# Altium PCB CH32V103R-R1-1v1.PcbDoc (part 2 of 2)
Units mil, origin at the board's own origin, x right, y up, seen from the top; angles counter-clockwise.
Board outline 2913.39 x 3002 mil, 2 copper layers (Top Layer, Bottom Layer); 62 components, 91 nets, 361 pads, 452 vias.
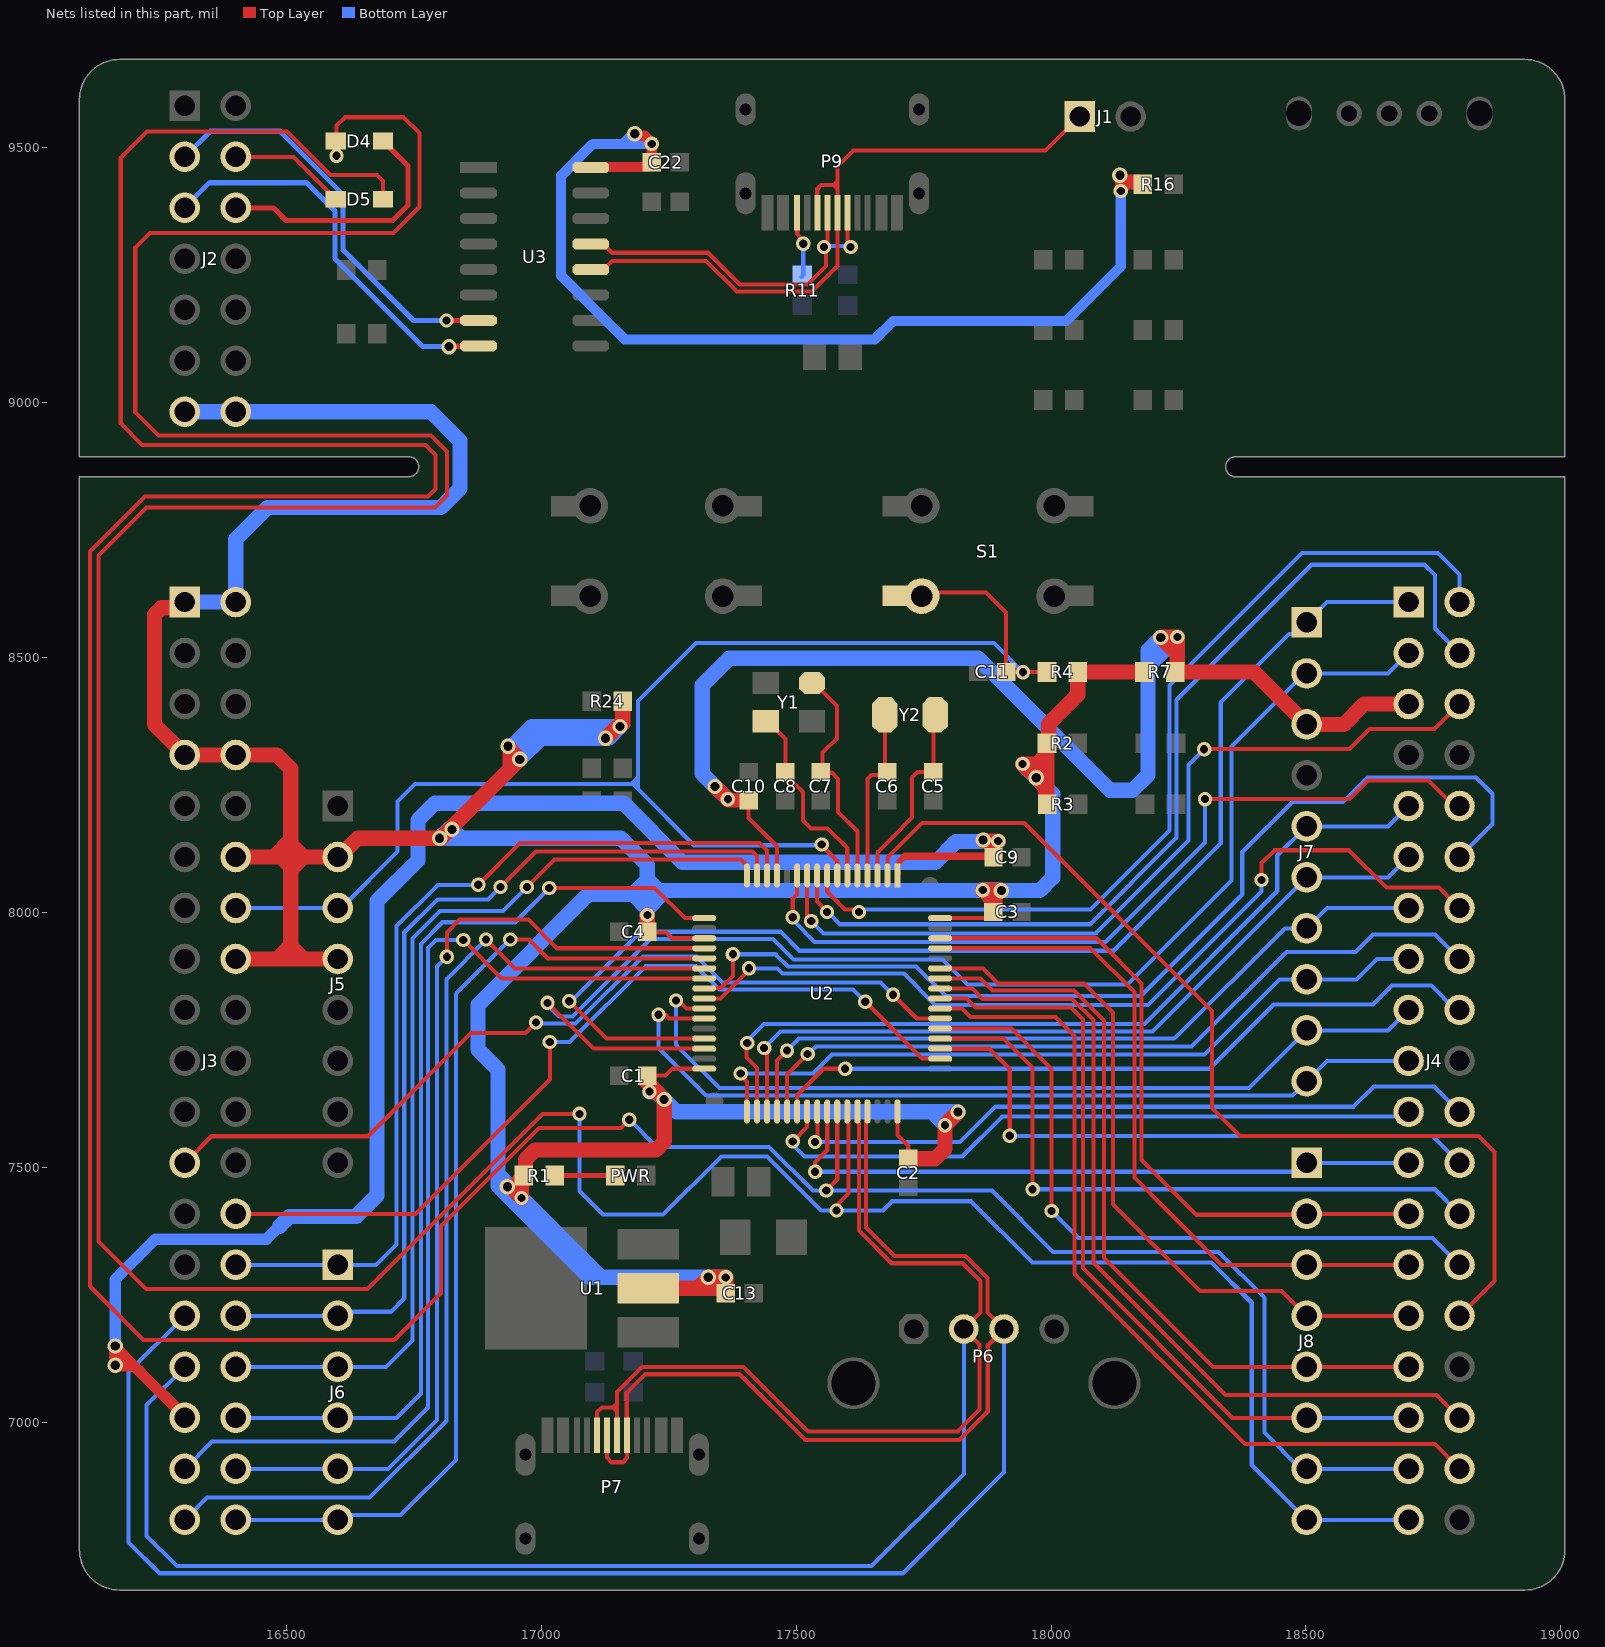
[diagram p2: the nets of this part, all layers, seen from the top]

## Via types
v1: diameter 24, hole 12, Top Layer to Bottom Layer, tented both sides, 303 vias
v2: diameter 28, hole 16, Top Layer to Bottom Layer, tented both sides, 114 vias
v3: diameter 30, hole 18, Top Layer to Bottom Layer, tented both sides, 35 vias

## Nets (pads, with @x,y where several pads share a name; then routed paths per layer and width w, separated by ;. In a path a pad name is that pad's centre, name@x,y a point inside that pad or via, vN(x,y) a via of type N, cw(c..) or ccw(c..) an arc to the next point about the centre after c; other vN are vias at no path point) (continued)
NetP9_B5: P9.B5 R11.1 | length 139
  Top Layer w8: P9.B5@17502.18,9372.24 17502.18,9330.48 17513.97,9318.69 v2(17513.97,9311.6) v2@17513.97,9304.52
  Bottom Layer w8: R11.1@17510.63,9246.57 17513.97,9249.9 17513.97,9273 v2(17513.97,9311.6)
NetPWR_1: PWR.1 R1.1 | length 118.9
  Top Layer w10: R1.1@17026.69,7484 PWR.1@17145.56,7484
NRST: C11.2 J3.14 J5.3 pad.@17699.01,8621.31 R4.1 S1.1 U2.7 | length 2839.9
  Top Layer w8: v2(17550.16,8133.34) 17550.16,8131.8 17580.7,8101.26 U2.7@17580.7,8072.55 ; S1.1@17746.25,8620.23 17753.35,8627.32 17872.7,8627.32 17912.02,8588.01 C11.2@17912.02,8471.72 R4.1@17992,8471.72
  Bottom Layer w8: J3.14@16401.17,8008.81 J5.3@16601.17,8008.81 16607.95,8008.81 16718.35,8119.21 16718.35,8217.29 16753.03,8251.97 17176.81,8251.97 ; v2(17550.16,8133.34) 17548.62,8131.8 17300.07,8131.8 17189.9,8241.97 ; v2(17945.08,8471.05) 17888.06,8528.08 17303.4,8528.08 17189.9,8414.57 17189.9,8265.06 ; 17176.81,8251.97 17179.9,8251.97 ; 17176.81,8251.97 17189.9,8265.06 ; 17179.9,8251.97 17188.35,8251.97 17189.9,8253.51 ; 17179.9,8251.97 17189.9,8241.97 ; 17189.9,8241.97 17189.9,8253.51 ; 17189.9,8253.51 17189.9,8265.06
PA0: J3.28 J6.1 U2.14 | length 1805.8
  Top Layer w8: v2(16876.64,8054.23) 16958.88,8136.48 17428.3,8136.48 17442.9,8121.87 U2.14@17442.9,8072.55
  Bottom Layer w8: J3.28@16401.17,7308.81 J6.1@16601.17,7308.81 16676.4,7308.81 16716.22,7348.63 16716.22,7973.22 16797.22,8054.23 v2(16876.64,8054.23)
PA1: J3.30 J6.2 U2.15 | length 1861.5
  Top Layer w8: v2(16920.17,8049.84) 16989.88,8119.56 17414.46,8119.56 17423.22,8110.8 U2.15@17423.22,8072.55
  Bottom Layer w8: J3.30@16401.17,7208.81 J6.2@16601.17,7208.81 16609.24,7216.88 16705.46,7216.88 16731.49,7242.91 16731.49,7960.43 16796.37,8025.3 16895.62,8025.3 v2(16920.17,8049.84)
PA2: J3.32 J6.3 U2.16 | length 1901.5
  Top Layer w8: v2(16972,8050) 17026.07,8104.07 17392.09,8104.07 17401.63,8094.53 17401.63,8093.2 17403.53,8091.3 U2.16@17403.53,8072.55
  Bottom Layer w8: J3.32@16401.17,7108.81 J6.3@16601.17,7108.81 16695.63,7108.81 16747.28,7160.46 16747.28,7949.21 16801.32,8003.25 16925.25,8003.25 v2(16972,8050)
PA3: J3.34 J6.4 U2.17 | length 1889.9
  Top Layer w8: v2(17016,8048) 17222.52,8048 17281.71,7988.81 U2.17@17319.79,7988.81
  Bottom Layer w8: J3.34@16401.17,7008.81 J6.4@16601.17,7008.81 16716.15,7008.81 16764.08,7056.74 16764.08,7938.11 16806.76,7980.79 16948.79,7980.79 v2(17016,8048)
PA4: J3.36 J6.5 U2.20 | length 1937.1
  Top Layer w8: v2(16815,7913) 16815,7961.01 16840.01,7986.02 16974.83,7986.02 17031.09,7929.75 U2.20@17319.79,7929.75
  Bottom Layer w8: J3.36@16401.17,6908.81 J6.5@16601.17,6908.81 16700.02,6908.81 16795.65,7004.44 16795.65,7893.65 v2(16815,7913)
PA5: J3.38 J6.6 U2.21 | length 1940.9
  Top Layer w8: v2(16939.33,7947.13) 16975.87,7947.13 17012.94,7910.07 U2.21@17319.79,7910.07
  Bottom Layer w8: J3.38@16401.17,6808.81 J6.6@16601.17,6808.81 16610.26,6817.9 16724.16,6817.9 16832.82,6926.56 16832.82,7840.62 v2(16939.33,7947.13)
PA6: J3.37 U2.22 | length 2020.8
  Top Layer w8: v2(16892,7947) 16948.62,7890.38 U2.22@17319.79,7890.38
  Bottom Layer w8: J3.37@16301.17,6808.81 16344.73,6852.37 16663.38,6852.37 16813.98,7002.97 16813.98,7868.98 v2(16892,7947)
PA7: J3.35 U2.23 | length 2007
  Top Layer w8: v2(16847.29,7945.84) 16922.43,7870.7 U2.23@17319.79,7870.7
  Bottom Layer w8: J3.35@16301.17,6908.81 16354.5,6962.14 16711.28,6962.14 16778.34,7029.2 16778.34,7930.02 16794.15,7945.84 v2(16847.29,7945.84)
PA8: J4.23 J8.1 U2.41 | length 1299
  Top Layer w8: v2(17537.38,7491.56) 17537.4,7510.04 17561.01,7533.66 U2.41@17561.01,7609.79
  Bottom Layer w8: v2(17537.38,7491.56) 18483.92,7491.56 J8.1@18501.17,7508.81 J4.23@18701.17,7508.81
PA9: D5.2 J4.35 J8.7 U2.42 | length 7501.3
  Top Layer w8: D5.2@16690,9399 16690,9434.35 16678.27,9446.08 16587.21,9446.08 16501.42,9531.87 16226.6,9531.87 16175.52,9480.78 16175.52,8958.58 16217.34,8916.75 16773.38,8916.75 16793.08,8897.05 16793.08,8830.68 16778.4,8816.01 16223.18,8816.01 16115.24,8708.06 16115.24,7266.95 16220.48,7161.71 16711.91,7161.71 16803.47,7253.27 16803.47,7384.94 16996.04,7577.51 17156.8,7577.51 v2(17172.9,7593.61) ; v2(17559.05,7454.62) 17580.7,7476.26 U2.42@17580.7,7609.79
  Bottom Layer w8: v2(17172.9,7593.61) 17226.09,7540.42 17447,7540.42 17532.81,7454.62 v2(17559.05,7454.62) 17883.86,7454.62 18004.11,7334.37 18328.88,7334.37 18418.25,7245 18418.25,6980.08 18489.52,6908.81 J8.7@18501.17,6908.81 J4.35@18701.17,6908.81
PA10: D4.1 J4.37 J8.8 U2.43 | length 7778.1
  Top Layer w8: D4.1@16598.43,9511.66 16598.43,9543.05 16614.93,9559.56 16730.42,9559.56 16761.53,9528.45 16761.53,9384.05 16710.16,9332.68 16232.39,9332.68 16203.99,9304.28 16203.99,8980.82 16249.19,8935.62 16784.21,8935.62 16815.53,8904.31 16815.53,8817.61 16791.74,8793.82 16225.63,8793.82 16131.63,8699.82 16131.63,7354.39 16224.66,7261.36 16659.21,7261.36 17002.85,7605 v2(17075,7605) ; v2(17579.3,7415.54) 17583.13,7419.37 17583.13,7428.96 17603,7448.83 17603,7607.18 U2.43@17600.38,7609.79
  Top Layer w10: v2(16598.43,9484.17) D4.1@16598.43,9511.66
  Bottom Layer w8: v2(17075,7605) 17075,7454.01 17121.64,7407.37 17238.94,7407.37 17353.34,7521.76 17443.03,7521.76 17549.25,7415.54 v2(17579.3,7415.54) 17670.24,7415.54 17688.26,7433.55 17843.24,7433.55 17963.24,7313.56 18314.66,7313.56 18393.64,7234.58 18393.64,6916.34 J8.8@18501.17,6808.81 J4.37@18701.17,6808.81
PA11: J3.31 P6.2 P7.A7 P7.B7 U2.44 | length 4145.1
  Top Layer w8: P7.B7@17109.55,6974.76 17109.55,7019.85 17119.16,7029.46 17140.98,7029.46 ; P7.A7@17148.92,6974.76 17148.92,7021.52 ; 17148.92,7044.6 17148.92,7037.4 ; U2.44@17620.07,7609.79 17620.07,7591.05 17623.04,7588.07 17623.04,7376.19 17687.2,7312.03 17826.17,7312.03 17861.3,7276.9 17861.3,7215.37 P6.2@17829,7183.06 17859.68,7152.38 17859.68,7025.02 17816.96,6982.31 17523.11,6982.31 17397.13,7108.28 17197.47,7108.28 17148.92,7059.74 17148.92,7037.4 ; 17140.98,7029.46 17148.92,7037.4 ; 17140.98,7029.46 17148.92,7029.46 ; 17140.98,7029.46 17148.92,7021.52 ; 17148.92,7021.52 17148.92,7029.46 ; 17148.92,7029.46 17148.92,7037.4
  Bottom Layer w8: J3.31@16301.17,7108.81 16226.02,7033.66 16226.02,6777.4 16285.4,6718.02 17647.96,6718.02 17829,6899.06 P6.2@17829,7183.06
PA12: J3.29 P6.3 P7.A6 P7.B6 U2.45 | length 4409.4
  Top Layer w8: P7.A6@17129.24,6974.76 17129.24,6930.78 17138.3,6921.71 17160.11,6921.71 17168.61,6930.21 P7.B6@17168.61,6974.76 17167.93,6975.44 17167.93,7058.94 17203.27,7094.28 17389.5,7094.28 17518.02,6965.76 17820.22,6965.76 17875.86,7021.4 17875.86,7151.18 P6.3@17907.74,7183.06 17875.3,7215.5 17875.3,7282.7 17831.97,7326.03 17693,7326.03 17637.25,7381.78 17637.25,7588.54 17639.75,7591.05 U2.45@17639.75,7609.79
  Bottom Layer w8: J3.29@16301.17,7208.81 16191.07,7098.71 16191.07,6764.14 16251.19,6704.02 17709.56,6704.02 17907.74,6902.21 P6.3@17907.74,7183.06
PA15: J3.26 U2.50 | length 1700.7
  Top Layer w8: J3.26@16401.17,7408.81 16753.34,7408.81 17017,7672.46 v2(17017,7746) ; v2(17635.6,7824.93) 17747.31,7713.22 U2.50@17782.55,7713.22
  Bottom Layer w8: v2(17017,7746) 17055.94,7746 17204.39,7894.46 17304.02,7894.46 17349.7,7848.78 17611.75,7848.78 v2(17635.6,7824.93)
PB0: J4.17 J7.9 U2.26 | length 1683.9
  Top Layer w8: v2(17264.52,7827.31) 17269.6,7827.31 17285.26,7811.64 U2.26@17319.79,7811.64
  Bottom Layer w8: v2(17264.52,7827.31) 17264.52,7740.52 17349.52,7655.52 18387.88,7655.52 J7.9@18501.17,7768.81 18661.17,7768.81 J4.17@18701.17,7808.81
PB1: J4.19 J7.10 U2.27 | length 1695.8
  Top Layer w8: v2(17230.21,7799.54) 17243.42,7799.54 17251,7791.96 U2.27@17319.79,7791.96
  Bottom Layer w8: v2(17230.21,7799.54) 17230.21,7734.35 17323.75,7640.8 18473.16,7640.8 J7.10@18501.17,7668.81 18541.17,7708.81 J4.19@18701.17,7708.81
PB3: J4.36 U2.55 | length 1665.6
  Top Layer w8: U2.55@17782.55,7811.64 17825.36,7811.64 17842.19,7794.82 18008.59,7794.82 18045.98,7757.43 18045.98,7291.39 18380.07,6957.3 18752.68,6957.3 J4.36@18801.17,6908.81
PB4: J4.33 J8.6 U2.56 | length 1544.8
  Top Layer w8: U2.56@17782.55,7831.33 17834.34,7831.33 17852.18,7813.48 18038.92,7813.48 18062.32,7790.08 18062.32,7302.71 18356.23,7008.81 J8.6@18501.17,7008.81
  Bottom Layer w8: J8.6@18501.17,7008.81 J4.33@18701.17,7008.81
PB5: J4.34 U2.57 | length 1646.4
  Top Layer w8: U2.57@17782.55,7851.01 17845.53,7851.01 17865.89,7830.65 18041.55,7830.65 18083.01,7789.19 18083.01,7312.99 18342,7054 18755.98,7054 J4.34@18801.17,7008.81
PB6: J4.31 J8.5 U2.58 | length 1506.7
  Top Layer w8: U2.58@17782.55,7870.7 17861.53,7870.7 17885.32,7846.91 18045.09,7846.91 18104.11,7787.89 18104.11,7322.75 18318.05,7108.81 J8.5@18501.17,7108.81 J4.31@18701.17,7108.81
PB7: J4.29 J8.4 U2.59 | length 1421
  Top Layer w8: U2.59@17782.55,7890.38 17866.62,7890.38 17896.09,7860.91 18064.38,7860.91 18121.9,7803.38 18121.9,7427.67 18291.97,7257.61 18452.38,7257.61 J8.4@18501.17,7208.81 J4.29@18701.17,7208.81
PB8: J4.27 J8.3 U2.61 | length 1389
  Top Layer w8: U2.61@17782.55,7929.75 18077.62,7929.75 18163.54,7843.84 18163.54,7479.92 18228.45,7415 18334.65,7308.81 J8.3@18501.17,7308.81 J4.27@18701.17,7308.81
PB9: J4.25 J8.2 U2.62 | length 1346.9
  Top Layer w8: U2.62@17782.55,7949.44 18089.07,7949.44 18177.54,7860.98 18177.54,7514.63 18242.45,7449.71 18285.09,7407.08 18499.44,7407.08 J8.2@18501.17,7408.81 J4.25@18701.17,7408.81
PB10: J4.1 J7.1 U2.29 | length 2458.9
  Top Layer w8: v2(17055,7826) 17128.41,7752.59 U2.29@17319.79,7752.59
  Bottom Layer w8: v2(17055,7826) 17059.14,7826 17195.35,7962.21 17469.09,7962.21 17506.39,7924.91 18122.65,7924.91 18332.76,8135.02 18332.76,8412.24 18466.69,8546.16 18478.53,8546.16 18541.17,8608.81 J4.1@18701.17,8608.81
PB11: J4.3 J7.2 U2.30 | length 2570
  Top Layer w8: v2(17012.48,7822.73) 17102.3,7732.9 U2.30@17319.79,7732.9
  Bottom Layer w8: v2(17012.48,7822.73) 17012.48,7818.87 17035.48,7795.86 17061.83,7795.86 17214.18,7948.21 17454.81,7948.21 17494.86,7908.16 17787.24,7908.16 17836.59,7858.81 18149.83,7858.81 18353.71,8062.69 18353.71,8325.63 18496.9,8468.81 J7.2@18501.17,8468.81 18661.17,8468.81 J4.3@18701.17,8508.81
PB12: J4.15 J7.8 U2.33 | length 1482.4
  Top Layer w8: v2(17391.35,7684.34) 17391.35,7679.95 17403.53,7667.76 U2.33@17403.53,7609.79
  Bottom Layer w8: v2(17391.35,7684.34) 17533.12,7684.34 17570.14,7721.37 18300.75,7721.37 18448.19,7868.81 18599.26,7868.81 18639.26,7908.81 J4.15@18701.17,7908.81
PB13: J4.9 J7.5 U2.34 | length 1676
  Top Layer w8: v2(17404.14,7743.8) 17402.65,7742.32 17402.65,7715.64 17423.22,7695.07 U2.34@17423.22,7609.79
  Bottom Layer w8: v2(17404.14,7743.8) 17404.14,7748.08 17437.12,7781.07 18182.99,7781.07 18443.65,8041.73 18443.65,8111.29 J7.5@18501.17,8168.81 18661.17,8168.81 J4.9@18701.17,8208.81
PB14: J4.11 J7.6 U2.35 | length 1545.8
  Top Layer w8: v2(17437.28,7734.25) 17442.9,7728.63 U2.35@17442.9,7609.79
  Bottom Layer w8: v2(17437.28,7734.25) 17469.67,7766.64 18199,7766.64 J7.6@18501.17,8068.81 18661.17,8068.81 J4.11@18701.17,8108.81
PB15: J4.13 J7.7 U2.36 | length 1462.3
  Top Layer w8: U2.36@17462.59,7609.79 17462.59,7709.59 v2(17482,7729)
  Bottom Layer w8: v2(17482,7729) 17505.64,7752.64 18242.51,7752.64 18458.69,7968.81 J7.7@18501.17,7968.81 18541.17,8008.81 J4.13@18701.17,8008.81
PC0: J4.2 U2.8 | length 1820
  Top Layer w8: U2.8@17561.01,8072.55 17561.01,8040.82 17595.72,8006.12 17619.77,8006.12 17619.77,8004.33 v2(17623.29,8000.81)
  Bottom Layer w8: v2(17623.29,8000.81) 17623.29,8002.61 17626.8,8006.12 18077.24,8006.12 18232.16,8161.03 18232.16,8445.16 18492.05,8705.06 18758.51,8705.06 18801.17,8662.39 J4.2@18801.17,8608.81
PC1: J4.4 U2.9 | length 1913.7
  Top Layer w8: U2.9@17541.33,8072.55 17541.33,8021.6 17560.69,8002.24 v2(17560.69,8000.81)
  Bottom Layer w8: v2(17560.69,8000.81) 17562.12,8000.81 17586.12,7976.81 18076.38,7976.81 18246.16,8146.59 18246.16,8417.15 18510.97,8681.97 18732.51,8681.97 18752.76,8661.72 18752.76,8557.22 J4.4@18801.17,8508.81
PC2: J4.6 U2.10 | length 1647.8
  Top Layer w8: U2.10@17521.64,8072.55 17521.64,7990.93 v2(17529.64,7982.93) ; v2(18300.24,8320.06) 18300.58,8320.4 18585.56,8320.4 18624.77,8359.61 18751.98,8359.61 J4.6@18801.17,8408.81
  Bottom Layer w8: v2(17529.64,7982.93) 17553.66,7958.91 18087.63,7958.91 18269.54,8140.83 18269.54,8289.37 v2(18300.24,8320.06)
PC3: J4.10 U2.11 | length 1618.3
  Top Layer w8: v2(17493.48,7990.52) 17493.48,8027.58 17501.42,8035.51 17501.42,8072.01 U2.11@17501.96,8072.55 ; v2(18302.12,8222.21) 18584.94,8222.21 18621.8,8259.07 18740.04,8259.07 18790.3,8208.81 J4.10@18801.17,8208.81
  Bottom Layer w8: v2(17493.48,7990.52) 17493.48,7985.15 17536.47,7942.16 18107.15,7942.16 18302.12,8137.14 v2(18302.12,8222.21)
PC4: J4.12 U2.24 | length 2023.1
  Top Layer w8: U2.24@17319.79,7851.01 17320.52,7851.74 17352.25,7851.74 17376,7875.49 v2(17376,7918)
  Bottom Layer w8: v2(17376,7918) 17460.05,7918 17483.9,7894.16 17735.35,7894.16 17793.57,7835.94 18175.93,7835.94 18375,8035.01 18375,8118.51 18473.1,8216.61 18572.29,8216.61 18620.46,8264.78 18833.75,8264.78 18865.7,8232.83 18865.7,8173.33 J4.12@18801.17,8108.81
PC5: J4.14 U2.25 | length 1742.7
  Top Layer w8: U2.25@17319.79,7831.33 17351.63,7831.33 17407.69,7887.39 v2(17407.69,7890.74) ; v2(18412.89,8063.75) 18412.89,8096.95 18437.89,8121.95 18584.63,8121.95 18657.77,8048.81 18761.17,8048.81 J4.14@18801.17,8008.81
  Bottom Layer w8: v2(17407.69,7890.74) 17408.49,7889.94 17463.08,7889.94 17473.08,7879.94 17711.2,7879.94 17772.28,7818.86 18190.37,7818.86 18412.89,8041.39 v2(18412.89,8063.75)
PC6: J4.16 U2.37 | length 1524.6
  Top Layer w8: U2.37@17482.27,7609.79 17482.27,7681.96 v2(17522.63,7722.32)
  Bottom Layer w8: v2(17522.63,7722.32) 17524.78,7722.32 17539.35,7736.88 18275.8,7736.88 18461.72,7922.81 18597.41,7922.81 18631.21,7956.61 18753.37,7956.61 J4.16@18801.17,7908.81
PC7: J4.18 U2.38 | length 1439.7
  Top Layer w8: U2.38@17501.96,7609.79 17501.96,7641.52 17553.93,7693.49 v2(17596.16,7693.49)
  Bottom Layer w8: v2(17596.16,7693.49) 18311.02,7693.49 18436.78,7819.25 18631.32,7819.25 18668.53,7856.47 18745.7,7856.47 18793.36,7808.81 J4.18@18801.17,7808.81
PC8: J4.21 U2.39 | length 1329.8
  Top Layer w8: v2(17493.49,7551.07) 17521.64,7579.23 U2.39@17521.64,7609.79
  Bottom Layer w8: v2(17493.49,7551.07) 17493.49,7545.66 17500.04,7539.11 17500.04,7538.51 17516.86,7521.69 17825.86,7521.69 17904.35,7600.18 18692.54,7600.18 J4.21@18701.17,7608.81
PC9: J4.22 U2.40 | length 1392.2
  Top Layer w8: v2(17537,7550) 17542.06,7555.06 17542.06,7609.06 U2.40@17541.33,7609.79
  Bottom Layer w8: v2(17537,7550) 17821.67,7550 17890.71,7619.04 18593.19,7619.04 18633.04,7658.89 18751.09,7658.89 J4.22@18801.17,7608.81
PC10: J4.24 U2.51 | length 1188.1
  Top Layer w8: U2.51@17782.55,7732.9 17782.79,7732.66 17879.23,7732.66 17919,7692.89 v2(17919,7562)
  Bottom Layer w8: v2(17919,7562) 18747.98,7562 J4.24@18801.17,7508.81
PC11: J4.26 U2.52 | length 1300.7
  Top Layer w8: U2.52@17782.55,7752.59 17906.99,7752.59 17963.93,7695.65 v2(17963.93,7457.18)
  Bottom Layer w8: v2(17963.93,7457.18) 18752.8,7457.18 J4.26@18801.17,7408.81
PC12: J4.28 U2.53 | length 1373.8
  Top Layer w8: U2.53@17782.55,7772.27 17921.98,7772.27 18001.23,7693.03 v2(18001.23,7414.42)
  Bottom Layer w8: v2(18001.23,7414.42) 18053.87,7361.77 18748.21,7361.77 J4.28@18801.17,7308.81
PC13: J4.30 U2.2 | length 1982.4
  Top Layer w8: U2.2@17679.12,8072.55 17679.12,8107.35 17747.22,8175.44 17947.44,8175.44 18315.96,7806.93 18315.96,7616.18 18370.39,7561.75 18837.94,7561.75 18869.87,7529.82 18869.87,7277.5 J4.30@18801.17,7208.81
PC14: C5.1 U2.3 Y2.1 | length 380.2
  Top Layer w8: U2.3@17659.44,8072.55 17659.44,8118.06 17688.84,8147.46 17727.31,8185.93 17727.31,8264.65 17738.05,8275.39 C5.1@17769.31,8275.39 17769.31,8384.17 Y2.1@17772.64,8387.51
PC15: C6.1 U2.4 Y2.2 | length 349.5
  Top Layer w8: U2.4@17639.75,8072.55 17639.75,8261.83 17647.43,8269.51 C6.1@17674.22,8269.51 ; Y2.2@17674.22,8387.51 C6.1@17674.22,8269.51 ; C6.1@17678.83,8269.51 C6.1@17674.22,8269.51
PD0: C7.2 U2.5 Y1.1 | length 454.4
  Top Layer w8: Y1.1@17531,8449.8 17542.93,8441.81 17579.86,8404.88 17579.86,8341.47 17552,8313.61 17552,8279.4 C7.2@17548,8275.4 17549.32,8274.08 17570.49,8274.08 17582.47,8262.1 17582.47,8196.9 17620.07,8159.3 U2.5@17620.07,8072.55
PD1: C8.2 U2.6 Y1.3 | length 389.9
  Top Layer w8: Y1.3@17440.45,8375 17444.39,8375 17479,8340.39 17479,8271 17493,8257 17513.93,8236.07 17513.93,8180.62 17529.48,8165.06 17561.69,8165.06 17600.38,8126.37 U2.6@17600.38,8072.55
PD2: J3.23 U2.54 | length 1701.7
  Top Layer w8: J3.23@16301.17,7508.81 16353.46,7561.1 16660.12,7561.1 16862.31,7763.29 16968.99,7763.29 v2(16989.99,7784.28) ; v2(17689.97,7838.62) 17736.63,7791.96 U2.54@17782.55,7791.96
  Bottom Layer w8: v2(16989.99,7784.28) 16992.41,7781.86 17067.65,7781.86 17199.64,7913.85 17304.43,7913.85 17355.5,7862.78 17665.81,7862.78 v2(17689.97,7838.62)
RX: D4.2 J2.6 | length 508.9
  Top Layer w10: J2.6@16401.17,9382 16474.88,9382 16499.82,9357.06 16708.93,9357.06 16739.13,9387.26 16739.13,9463.87 16704.69,9498.32 16704.69,9501.66 16693.35,9513 D4.2@16690,9513
RX0: J2.3 U3.7 | length 814.1
  Top Layer w10: v2(16814.37,9161.16) 16814.45,9161.08 16876.92,9161.08 U3.7@16877,9161
  Bottom Layer w10: J2.3@16301.17,9482 16351.4,9532.23 16487.24,9532.23 16611.75,9407.72 16611.75,9299.07 16749.66,9161.16 v2(16814.37,9161.16)
TX: D5.1 J2.4 | length 232.3
  Top Layer w8: J2.4@16401.17,9482 16514.09,9482 16581.4,9414.68 16581.4,9411.34 16593.74,9399 D5.1@16597.09,9399
TX0: J2.5 U3.8 | length 785.7
  Top Layer w10: v3(16819.37,9109.76) 16819.99,9110.38 16876.38,9110.38 U3.8@16877,9111
  Bottom Layer w10: J2.5@16300,9382 16349.18,9431.18 16539.92,9431.18 16595.49,9375.61 16595.49,9282.22 16767.95,9109.76 v3(16819.37,9109.76)
USB_N: P9.A7 P9.B7 U3.13 | length 735.2
  Top Layer w8: U3.13@17097,9311 17117.17,9311 17124.17,9304 17125.75,9305.58 17127.42,9305.58 17139.16,9293.84 17327.19,9293.84 17389.47,9231.56 17522.49,9231.56 17558.7,9267.78 17558.7,9301.26 v2(17554.88,9305.09) ; v2@17558.7,9305.09 17558.7,9314.33 17561.24,9316.86 P9.A7@17561.24,9372.24 ; P9.B7@17600.61,9372.24 17600.61,9318.61 17603.16,9316.05 17603.16,9314.33 17605.4,9312.09 v2@17606.99,9312.09
  Bottom Layer w8: v2(17554.88,9305.09) 17556.53,9306.75 17605.33,9306.75 v2(17606.99,9305.09)
USB_P: J1.1 P9.A6 P9.B6 U3.12 | length 1351.7
  Top Layer w8: U3.12@17097,9261 17122,9261 17138.55,9277.55 17323.68,9277.55 17383.67,9217.56 17530.67,9217.56 17580.92,9267.81 P9.A6@17580.92,9372.24 17580.92,9418.79 ; P9.B6@17541.55,9372.24 17541.55,9419.38 17548.98,9426.8 17572.9,9426.8 ; J1.1@18056,9561 17989.45,9494.45 17612.13,9494.45 17580.92,9463.24 17580.92,9434.82 ; 17572.9,9426.8 17580.92,9434.82 ; 17572.9,9426.8 17580.92,9418.79 ; 17580.92,9418.79 17580.92,9434.82
V33: C22.1 R16.2 U3.16 | length 2269
  Top Layer w20: U3.16@17097,9461 17098,9462 17208,9462 C22.1@17217,9471 v2@17217.02,9507.34 ; v3(17183.51,9527.38) 17186.22,9527.38 17190.23,9523.37 17203.21,9523.37 17217.05,9509.53 v2(17217.05,9507.36) ; v3(18135,9446) 18137.71,9446 18146.43,9437.28 18171.69,9437.28 18180,9428.97 R16.2@18180,9427.99 18149.51,9427.99 v2(18136.59,9415.07) 18135.8,9415.87 18135.8,9445.2 v3(18135,9446)
  Bottom Layer w20: v2@17214.88,9507.36 v2(17217.05,9507.36) ; 17783.28,9160.08 17690.45,9160.08 ; v3(18135,9446) 18136.59,9444.41 v2(18136.59,9415.07) 18136.59,9266.93 18029.75,9160.08 17690.45,9160.08 ; 17160.79,9507.36 17204.7,9507.36 17204.7,9508.89 17186.22,9527.38 17180.8,9527.38 17160.79,9507.36 ; 17160.79,9507.36 17101.5,9507.36 17039.14,9445 17039.14,9248.84 17127.89,9160.08 17164.02,9123.95 17654.32,9123.95 17690.45,9160.08
VBAT: C9.1 J3.33 U2.1 | length 3635.6
  Top Layer w8: U2.1@17698.69,8093.09 U2.1@17700.71,8095.12 ; U2.1@17698.81,8072.55 17700.71,8074.45 U2.1@17700.71,8095.12 ; 17725.75,8107.27 17712.87,8107.27 ; C9.1@17887.02,8104.24 17886.31,8104.94 17883.99,8107.27 17712.87,8107.27 ; C9.1@17887.02,8113.24 17886.31,8113.24 17712.67,8113.24 17706.69,8107.27 ; U2.1@17700.71,8095.12 17700.71,8101.29 17706.69,8107.27 ; U2.1@17700.71,8095.12 17712.87,8107.27 ; 17706.69,8107.27 17712.87,8107.27
  Top Layer w22: v3(16164.6,7149.61) 16164.6,7147.5 v3@16164.67,7147.43 ; 16215.86,7096.24 16201.62,7110.47 ; J3.33@16301.17,7008.81 16301.17,7010.92 16201.62,7110.47 ; v3@16164.67,7147.43 16201.62,7110.47 ; v3@16164.67,7147.43 16164.67,7112.07 v3(16164.74,7112) 16166.27,7110.47 16201.62,7110.47
  Top Layer w30: v3(17866.76,8142.15) 17868.88,8140.02 v2(17896.31,8140.02) 17890.02,8133.73 C9.1@17890.02,8107.24 ; C9.1@17886.31,8104.94 17886.31,8113.24 v2@17886.31,8139.02
  Bottom Layer w22: v3(16164.74,7112) 16164.67,7112.07 16164.67,7149.54 v3(16164.6,7149.61) 16164.6,7280.22 16243.57,7359.2 16461.71,7359.2 16487.09,7384.58
  Bottom Layer w30: 16487.09,7384.58 16506.07,7403.56 16637.23,7403.56 16678.19,7444.53 ; 16678.19,7518.32 16678.19,7444.53 ; v2@17896.31,8139.02 17813.59,8139.02 17772.91,8098.34 17277.28,8098.34 17161.37,8214.25 16791.65,8214.25 16758.51,8181.11 16758.51,8102.44 16678.19,8022.12 16678.19,7444.53
VCC: C1.2 C2.2 C3.2 C4.2 C13.1 J2.13 J2.14 J3.1 J3.2 J3.7 J3.8 J3.12 J3.16 J5.2 J5.4 R1.2 R2.1 R3.1 R4.2 R7.1 R24.2 U1.2 U2.19 U2.32 U2.48 U2.64 | length 10452.4
  Top Layer w8: C1.2@17208,7680 17244.13,7680 17257.66,7693.53 U2.32@17319.79,7693.53 ; C4.2@17208,7958 17210.76,7960.76 17244.99,7960.76 17256.31,7949.44 U2.19@17319.79,7949.44 ; U2.48@17698.81,7609.79 17698.81,7563.47 17720,7542.28 C2.2@17720,7517 ; U2.64@17782.55,7988.81 C3.2@17885.19,7988.81
  Top Layer w30: J3.1@16301.17,8608.81 16289.87,8597.51 16255.04,8597.51 16241.86,8584.33 16241.86,8368.12 J3.7@16301.17,8308.81 J3.8@16401.17,8308.81 16482.29,8308.81 16508.66,8282.44 16508.66,8141.69 ; J3.16@16401.17,7908.81 16482.55,7908.81 ; J3.12@16401.17,8108.81 16475.78,8108.81 ; J5.4@16601.17,7908.81 16533.74,7908.81 ; v3(16933.71,7462.07) v3@16939.57,7462.07 ; v3@16938.93,8321.87 v3@16938.93,8319.39 ; R1.2@16962.75,7479.71 16962.75,7467.72 16961.55,7466.53 v2(16961.55,7440.09) v3@16939.57,7462.07 ; R1.2@16966.06,7484 16966.06,7483.02 16955.56,7472.52 16945.11,7462.07 v3@16939.57,7462.07 ; R1.2@16969.36,7486.32 16969.36,7515.41 16988.21,7534.25 17225.13,7534.25 17241.2,7550.33 v3(17241.2,7633.37) 17219.29,7655.29 17207.26,7667.32 17207.26,7679.26 C1.2@17208,7680 ; v3(17126.09,8341.51) v3@17160,8375.42 ; v3(17154.74,8364.54) 17160,8369.8 v3@17160,8375.42 ; R24.2@17160,8414 v3@17160,8375.42 ; C4.2@17208,7962 17208.25,7962.25 v2(17208.25,7995.19) ; U1.2@17210,7263 17306.36,7263 ; C13.1@17362.03,7263.03 v2(17362.03,7284.41) v3@17340.59,7284.41 ; C2.2@17720,7517 17772.42,7517 17791.89,7536.48 v2(17791.89,7582.73) v3(17817.71,7608.54) ; C3.2@17884,7999 17885.19,8000.19 17885.19,8024.81 v2(17866.19,8043.81) v3@17901.54,8043.81 ; C3.2@17887,8001 17890,8004 17890,8032.27 v3@17901.54,8043.81 ; v3(17902.55,8042.81) v3@17901.54,8043.81 ; R3.1@17992.37,8212 R3.1@17992.19,8212.18 ; R7.1@18182.99,8471.72 R4.2@18052.63,8471.72 18052.63,8427.23 17995.31,8369.91 17995.31,8335.31 R2.1@17992,8332 17992.19,8331.82 17992.19,8310.4 ; 16475.78,8108.81 16489.64,8108.81 ; 16475.78,8108.81 16508.66,8141.69 ; 16482.55,7908.81 16508.66,7908.81 ; 16482.55,7908.81 16508.66,7934.92 ; 16489.64,8108.81 16508.66,8108.81 ; 16489.64,8108.81 16508.66,8089.79 ; 16508.66,7908.81 16533.74,7908.81 ; 16508.66,7908.81 16508.66,7933.89 ; 16508.66,7933.89 16508.66,7934.92 ; 16508.66,7933.89 16533.74,7908.81 ; 16508.66,7934.92 16508.66,8089.79 ; 16508.66,8089.79 16515.38,8089.79 16534.4,8108.81 ; 16508.66,8089.79 16508.66,8108.81 ; 16508.66,8108.81 16534.4,8108.81 ; 16508.66,8108.81 16508.66,8134.55 ; 16508.66,8134.55 16508.66,8141.69 ; 16508.66,8134.55 16534.4,8108.81 ; 16534.4,8108.81 J5.2@16601.17,8108.81 16603.58,8108.81 16640.41,8145.64 v3(16800.94,8145.64) 16803.94,8145.64 16803.94,8146.17 16938.93,8281.17 ; 16938.93,8281.17 v3@16938.93,8319.39 ; 16938.93,8281.17 v3(16958.04,8300.28) v3@16938.93,8319.39 ; 17306.36,7263 17324.84,7263 ; 17306.36,7263 v3(17327.77,7284.41) ; 17324.84,7263 17362,7263 v3@17340.59,7284.41 ; 17324.84,7263 17327.77,7265.93 v3(17327.77,7284.41) ; v3(17327.77,7284.41) v3@17340.59,7284.41 ; 17968.65,8291.07 17992.19,8267.54 ; 17968.65,8291.07 17972.86,8291.07 ; 17968.65,8291.07 v2(17944.28,8291.07) v3(17971.03,8264.33) 17989.06,8246.29 17989.06,8215.31 R3.1@17992.19,8212.18 ; 17972.86,8291.07 17990.09,8291.07 17992.19,8288.98 ; 17972.86,8291.07 17992.19,8310.4 ; R3.1@17992.19,8212.18 17992.19,8267.54 ; 17992.19,8267.54 17992.19,8288.98 ; 17992.19,8288.98 17992.19,8310.4
  Bottom Layer w30: J3.1@16301.17,8608.81 J3.2@16401.17,8608.81 16401.17,8732.29 16463.28,8794.39 16803.51,8794.39 16840.98,8831.87 16840.98,8925.02 16784,8982 J2.14@16401.17,8982 J2.13@16301.17,8982 ; v3(16800.94,8145.64) 16818.29,8163 v3(16825,8163) 16842.36,8145.64 ; v3@16803.94,8145.64 16842.36,8145.64 ; v3@16938.93,8321.87 16981.59,8364.54 17022.3,8364.54 ; v3(16958.04,8300.28) 16999.28,8341.51 ; v2(17208.25,7995.19) v2@17208.25,8007.21 ; v2(17212.57,7648.57) 17226.01,7648.57 v3(17241.2,7633.37) 17265.41,7609.17 17765.45,7609.17 ; v2(17362.03,7284.41) v3(17327.77,7284.41) 17117.24,7284.41 ; v2@17878.06,8042.95 v2@17867.06,8042.95 ; v3@17892.33,8042.95 v3@17902.4,8042.95 ; v2(17944.28,8291.07) 18003.16,8232.2 18003.16,8068.07 17978.04,8042.95 v3@17902.4,8042.95 ; 16842.36,8145.64 17155.64,8145.64 17172.07,8129.21 17208.25,8093.03 17208.25,8064.42 ; 16915.26,7486.39 16915.26,7464.2 16925.55,7453.91 17095.05,7284.41 17117.24,7284.41 ; 16915.26,7486.39 16936.64,7465 v2(16961.55,7440.09) 17117.24,7284.41 ; 16915.26,7486.39 16915.26,7691.69 16876.07,7730.87 16876.07,7818.81 17093.08,8035.81 17179.65,8035.81 ; 16999.28,8341.51 17022.3,8364.54 ; 16999.28,8341.51 v3(17126.09,8341.51) 17131.71,8341.51 v3(17154.74,8364.54) 17022.3,8364.54 ; 17179.65,8035.81 17208.25,8035.81 ; 17179.65,8035.81 v2@17208.25,8007.21 ; 17179.65,8035.81 17208.25,8064.42 ; v2@17208.25,8007.21 17208.25,8033.78 ; v2@17208.25,8007.21 17236.86,8035.81 ; 17208.25,8033.78 17208.25,8035.81 ; 17208.25,8033.78 17210.29,8035.81 17236.86,8035.81 ; 17208.25,8035.81 17208.25,8064.42 ; 17208.25,8064.42 17229.72,8042.95 ; 17229.72,8042.95 17236.86,8035.81 ; 17229.72,8042.95 v2@17867.06,8042.95 ; 17765.45,7609.17 17817.08,7609.17 v3(17817.71,7608.54) v2(17791.89,7582.73) 17765.45,7609.17 ; v2@17867.06,8042.95 17867.2,8042.81 v3(17902.55,8042.81) v3@17902.4,8042.95 ; v2@17867.06,8042.95 v2(17866.19,8043.81) 17866.19,8044.01 17865.29,8044.91 17900.44,8044.91 v3@17902.4,8042.95
  other v3: 16934.93,8325.87
VDDA: C10.1 J4.5 J7.3 R7.2 U2.13 | length 2565.8
  Top Layer w8: C10.1@17407,8216 17407,8185.44 17462.59,8129.85 U2.13@17462.59,8072.55
  Top Layer w30: v3(17341.04,8247.22) v2(17366.19,8222.06) 17367.85,8220.4 C10.1@17407,8220.4 ; J4.5@18701.17,8408.81 18614.15,8408.81 18574.15,8368.81 J7.3@18501.17,8368.81 18398.27,8471.72 R7.2@18243.62,8471.72 18241.03,8474.31 18247.78,8481.07 18247.78,8506.69 ; 18247.78,8506.69 v2(18247.78,8540.04) 18216.1,8540.04 v3(18215.27,8539.21) 18247.78,8506.69
  Bottom Layer w30: v2(17366.19,8222.06) v3(17341.04,8247.22) 17315.88,8272.37 17315.88,8445.49 17369.07,8498.67 17856.6,8498.67 18115.62,8239.66 18159.9,8239.66 18190.12,8269.88 18190.12,8482.38 ; 18190.12,8482.38 v2(18247.78,8540.04) 18246.95,8539.21 v3(18215.27,8539.21) 18190.12,8514.06 18190.12,8482.38
pads on no net: J3.9 P7.A8 P7.B8 P9.A8 P9.B8 S1.2 S1.4 S2.2 S2.4 S3.0 S3.2 U1. U2.0 U3.3 U3.6 U3.9 U3.10 U3.11

## Polygon pours and split planes (outlines as drawn)
GND on Bottom Layer "GND" (hatched Horizontal grid 8 track 8, remove dead copper, pour order 0): 16090.55,9680.53 16090.55,6664.87 19007.87,6664.87 19007.87,9678.77 19009.7,9678.77
GND on Top Layer "GND" (hatched Horizontal grid 8 track 8, remove dead copper, pour order 1): 16090.34,9677.53 19009.55,9677.53 19009.55,6664.66 16091.14,6664.66

## Keep-outs
Keep-Out Layer:
  lines w10: 18125.97,8854.48 ccw(c18125.97,8874.16) 18125.97,8893.85 16976.37,8893.85 ccw(c16976.37,8874.16) 16976.37,8854.48 18127.93,8854.48 ; 18929.12,6671 ccw(c18929.12,6671) 18929.12,6671 ; 18929.12,6671 ccw(c18929.12,6749.74) 19007.86,6749.74 19007.86,9594.26 ccw(c18929.12,9594.26) 18929.12,9673 16173.22,9673 ccw(c16173.22,9594.26) 16094.48,9594.26 16094.48,6749.74 ccw(c16173.22,6749.74) 16173.22,6671 18929.12,6671 ; 16094,8854.48 16094,8893.85 16740.15,8893.85 cw(c16740.15,8874.16) 16740.15,8854.48 16094,8854.48 ; 18362.2,8854.48 cw(c18362.2,8874.16) 18362.2,8893.85 19008.34,8893.85 19008.34,8854.48 18362.2,8854.48

## Silkscreen, mask and mechanical layers (free items; w line width, h text height)
Top Overlay:
  text "5V" at 16163.54,9555.47 h35
  text "5V" at 16466.59,9555.47 h35
  text "RX0" at 16135.72,9455.68 h35
  text "TX" at 16466.59,9455.68 h35
  text "OFF" at 18556.6,9405.78 h35
  text "ON" at 18713.73,9405.78 h35
  text "TX0" at 16139.38,9355.89 h35
  text "RX" at 16466.59,9355.89 h35
  text "PWR" at 17787.19,9257.03 h35
  text "GND" at 16132.05,9256.11 h35
  text "GND" at 16466.59,9256.11 h35
  text "CLK0" at 16108.22,9156.32 h35
  text "CLK" at 16466.59,9156.32 h35
  text "RUN" at 17787.19,9118.51 h35
  text "DIO0" at 16124.72,9056.53 h35
  text "DIO" at 16466.59,9056.53 h35
  text "CON" at 17787.19,8981.68 h35
  text "3V3" at 16135.72,8956.74 h35
  text "3V3" at 16466.59,8956.74 h35
  text "CH32V103R-R1-1v1" at 18377.16,8750.32 h40
  text "User" at 17436.42,8676.4 h35
  text "RST" at 18096.65,8676.4 h35
  text "PC0" at 18872.42,8585.89 h35
  text "VCC" at 16464.97,8584.43 h35
  text "VCC" at 16127.66,8579.96 h35
  text "PB10" at 18308.79,8539.52 h35
  text "BOOT0" at 16464.97,8485.94 h35
  text "PC1" at 18872.42,8485.94 h35
  text "BOOT1" at 16100.71,8484.35 h33
  text "PB11" at 18323.78,8440.05 h35
  text "PC2" at 18872.42,8385.99 h35
  text "GND" at 16129.32,8384.59 h35
  text "GND" at 16464.97,8381.77 h35
  text "VDDA" at 18299.95,8340.58 h35
  text "VCC" at 16127.66,8287.46 h35
  text "+5V" at 18872.42,8286.04 h35
  text "VCC" at 16464.97,8284.47 h35
  text "GND" at 18330.78,8241.11 h35
  text "PC3" at 18872.42,8186.09 h35
  text "PB13" at 18308.79,8141.64 h35
  text "PC4" at 18872.42,8086.14 h35
  text "VCC" at 16668.5,8084.34 h35
  text "LED1" at 16127.82,8082.14 h35
  text "PB14" at 18307.12,8042.17 h35
  text "PC5" at 18872.42,7986.19 h35
  text "LED2" at 16112.83,7982.31 h35
  text "NRST" at 16668.5,7982.17 h35
  text "PB15" at 18308.79,7942.7 h35
  text "PC6" at 18872.42,7886.24 h35
  text "VCC" at 16668.5,7884.09 h35
  text "KEY" at 16133.32,7882.48 h35
  text "PB12" at 18308.79,7843.23 h35
  text "+5V" at 16668.5,7786.67 h35
  text "PC7" at 18872.42,7786.29 h35
  text "+5V" at 16120.49,7782.65 h35
  text "PB0" at 18334.45,7743.76 h35
  text "GND" at 18872.42,7686.34 h35
  text "GND" at 16668.5,7684.65 h35
  text "GND" at 16129.32,7682.82 h35
  text "PB1" at 18349.44,7644.29 h35
  text "PC9" at 18872.42,7586.4 h35
  text "GND" at 16668.5,7584.12 h35
  text "GND" at 16129.32,7582.99 h35
  text "PC8" at 18549.19,7582.76 h35
  text "PC10" at 18872.42,7486.45 h35
  text "+5V" at 16668.5,7483.73 h35
  text "PD2" at 16132.99,7483.16 h35
  text "PA8" at 18330.78,7479.51 h35
  text "PA15" at 16462.05,7385.64 h35
  text "PC11" at 18872.42,7386.5 h35
  text "PA14" at 16102,7383.33 h35
  text "PB9" at 18336.11,7380.24 h35
  text "PC12" at 18871.42,7286.55 h35
  text "PA13" at 16103.66,7283.5 h35
  text "PA0" at 16668.5,7281.54 h35
  text "PB8" at 18334.45,7280.97 h35
  text "PC13" at 18871.42,7186.6 h35
  text "PA1" at 16668.5,7185.44 h35
  text "PA12" at 16103.66,7183.67 h35
  text "PB7" at 18334.45,7181.7 h35
  text "VSSA" at 18862.42,7086.65 h35
  text "PA11" at 16118.66,7083.84 h35
  text "PA2" at 16668.5,7083.83 h35
  text "PB6" at 18336.11,7082.43 h35
  text "PB5" at 18872.42,6986.7 h35
  text "VBAT" at 16098.16,6984.01 h35
  text "PA3" at 16668.5,6983.42 h35
  text "PB4" at 18332.78,6983.16 h35
  text "PB3" at 18872.42,6886.75 h35
  text "PA7" at 16129.32,6884.18 h35
  text "PA9" at 18332.45,6883.89 h35
  text "PA4" at 16668.5,6881.82 h35
  text "PB2" at 18872.42,6786.8 h32
  text "PA10" at 18305.12,6784.63 h35
  text "PA6" at 16130.99,6784.35 h35
  text "PA5" at 16668.5,6783.02 h35
Bottom Overlay:
  drawing of 3656 lines, arcs and shapes, not listed
  text "http://wch.cn" at 17823.51,8135.95 h98.43
Top Solder:
  drawing of 3656 lines, arcs and shapes, not listed
  text "http://wch.cn" at 18435.18,8939.28 h98.43
Mechanical 1:
  lines w10: 18125.97,8854.38 ccw(c18125.97,8874.16) 18125.97,8893.95 ; 18127.93,8854.48 16976.37,8854.48 cw(c16976.37,8874.16) 16976.37,8893.85 18127.93,8893.85 ; 19007.86,8893.85 19007.86,9594.26 ccw(c18929.12,9594.26) 18929.12,9673 16173.22,9673 ccw(c16173.22,9594.26) 16094.48,9594.26 16094.48,8893.85 16740.15,8893.85 cw(c16740.15,8874.16) 16740.15,8854.48 16094.48,8854.48 16094.48,6749.74 ccw(c16173.22,6749.74) 16173.22,6671 18929.12,6671 ccw(c18929.12,6749.74) 19007.86,6749.74 19007.86,8854.48 18362.2,8854.48 cw(c18362.2,8874.16) 18362.2,8893.85 19007.86,8893.85 ; 19007.86,8893.85 19007.86,8893.85

## Text inside footprints (layer, text, board x,y; h text height)
D1: Top Overlay "+" at 17946.92,9131.51 h40 r90
D2: Top Overlay "+" at 17946.92,8994.01 h40 r90
D3: Top Overlay "+" at 17946.92,9269.01 h40 r90
LED1: Top Overlay "+" at 18146.29,8321.01 h40 r90
LED2: Top Overlay "+" at 18146.29,8201.01 h40 r90
P6: Top Overlay "D-" at 17790.57,7063.06 h40; Top Overlay "D+" at 17880.57,7063.06 h40; Top Overlay "V" at 17710.57,7063.06 h40; Top Overlay "G" at 17990.57,7063.06 h40
PWR: Top Overlay "+" at 17107.48,7473.01 h40 r90